# Altium PCB IQDemod.PcbDoc (part 1 of 2)
Units mm, origin at the board's own origin, x right, y up, seen from the top; angles counter-clockwise.
Board outline 91.45 x 68.67 mm, 4 copper layers (Top Layer, Layer 1, Layer 2, Bottom Layer), stack 1.586 mm thick; 81 components, 32 nets, 226 pads, 413 vias.
Unrouted connection lines stored in the file: 58.
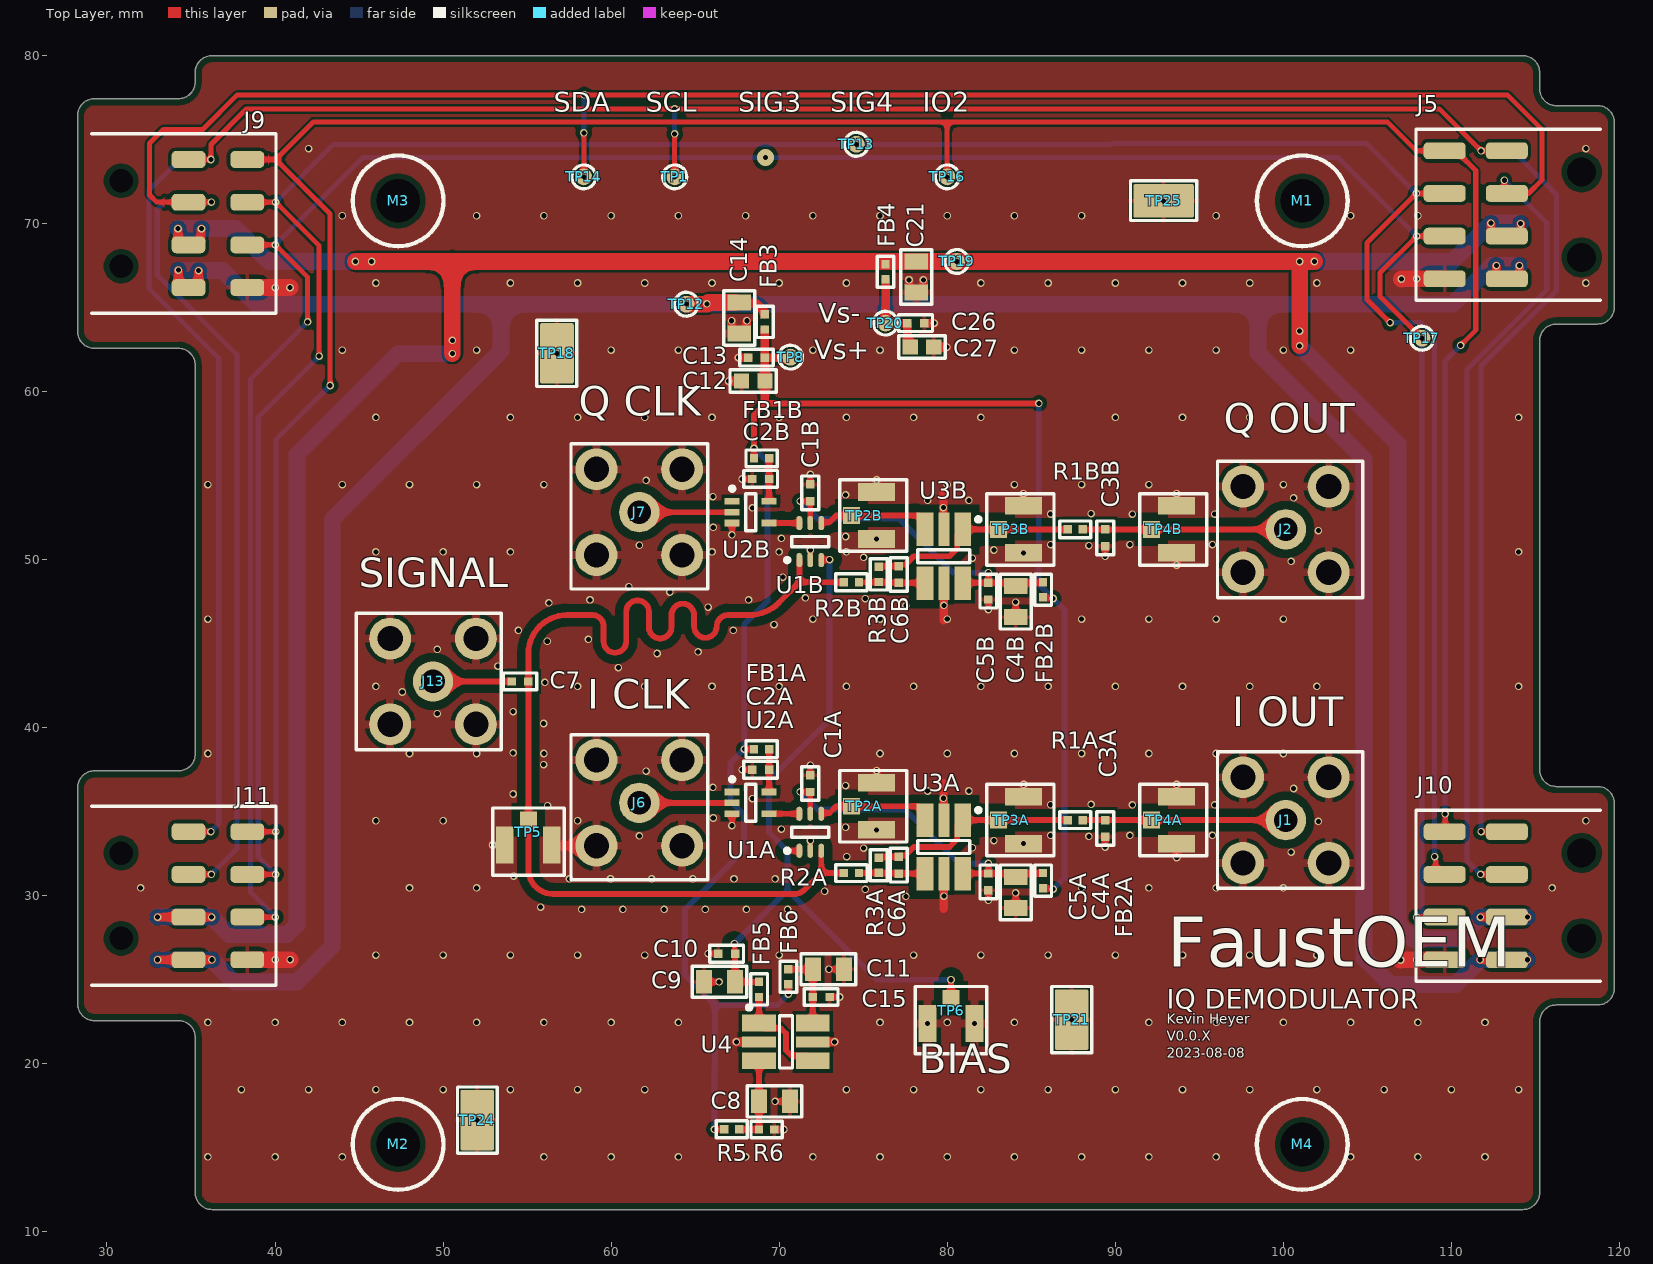
[diagram p0: Top Layer view]
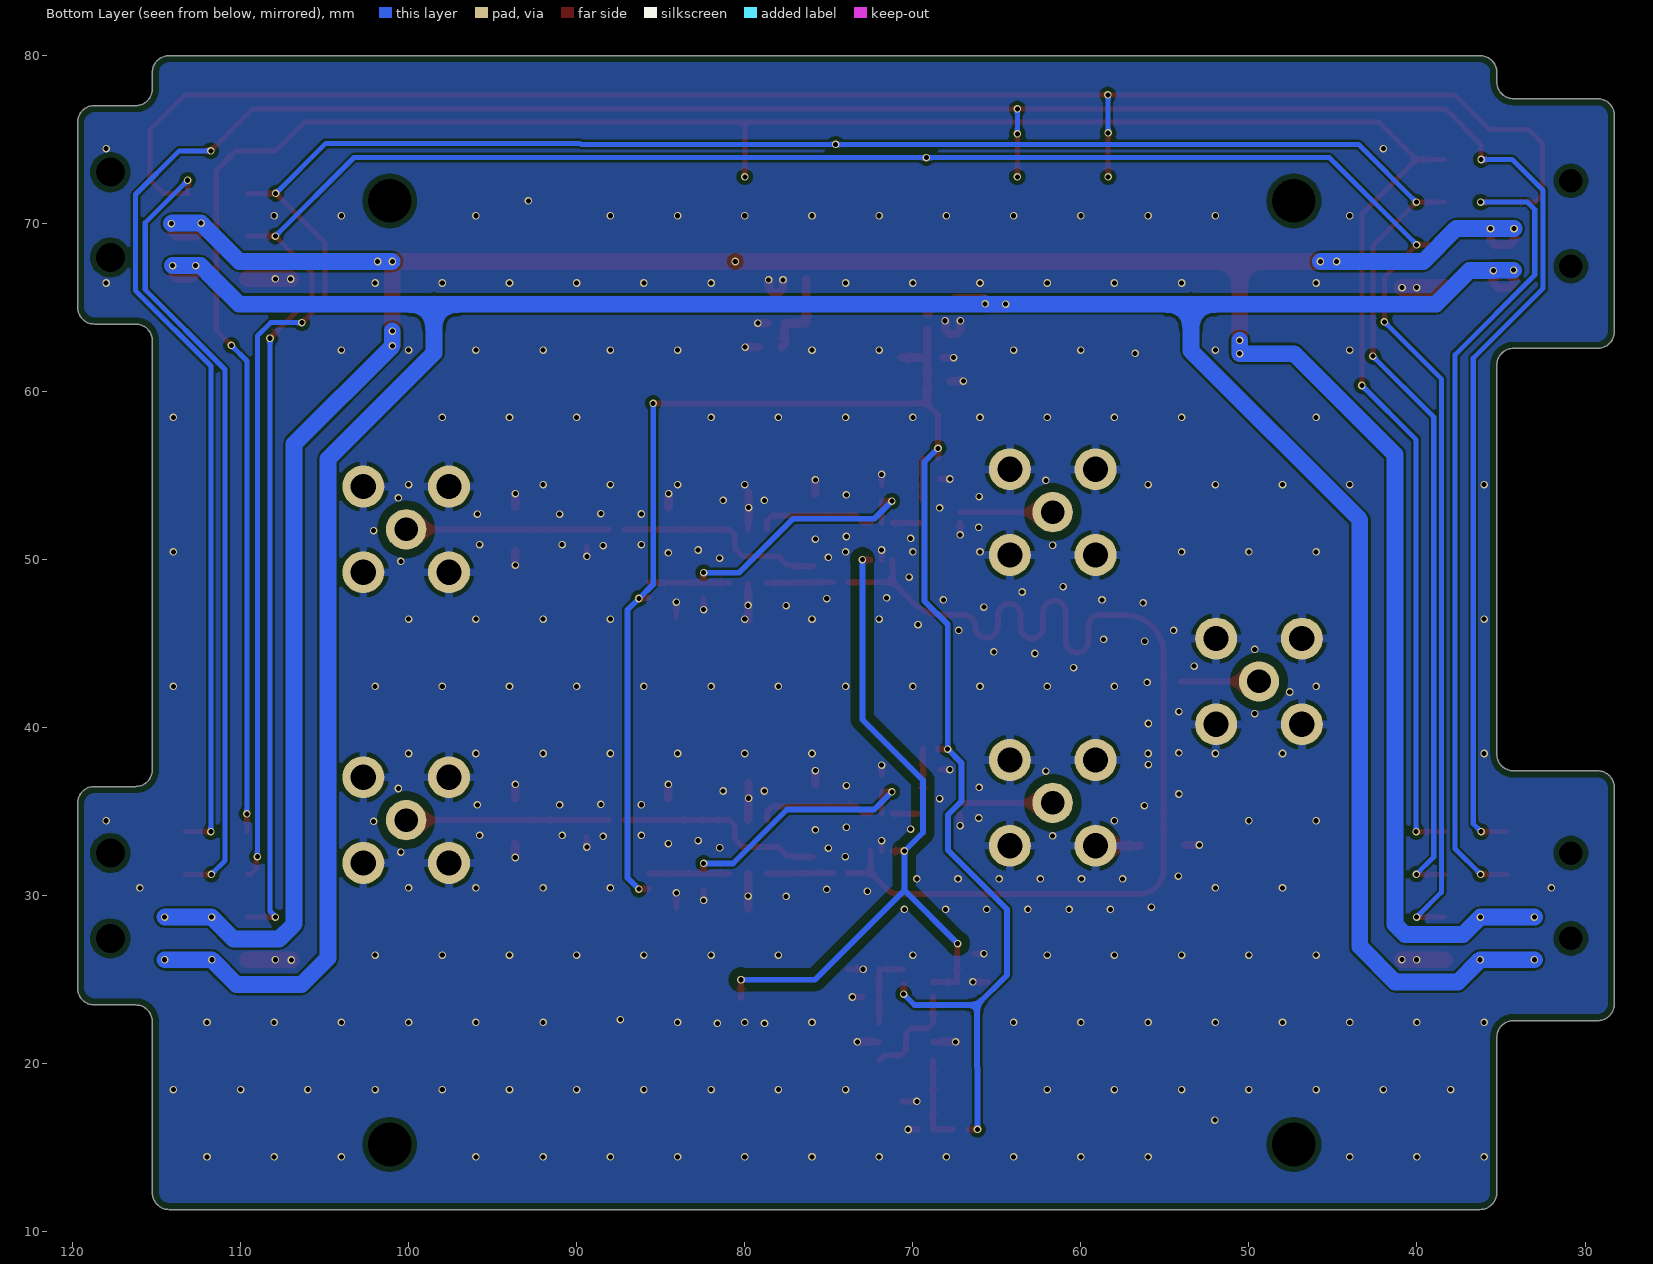
[diagram p1: Bottom Layer view, seen from below]
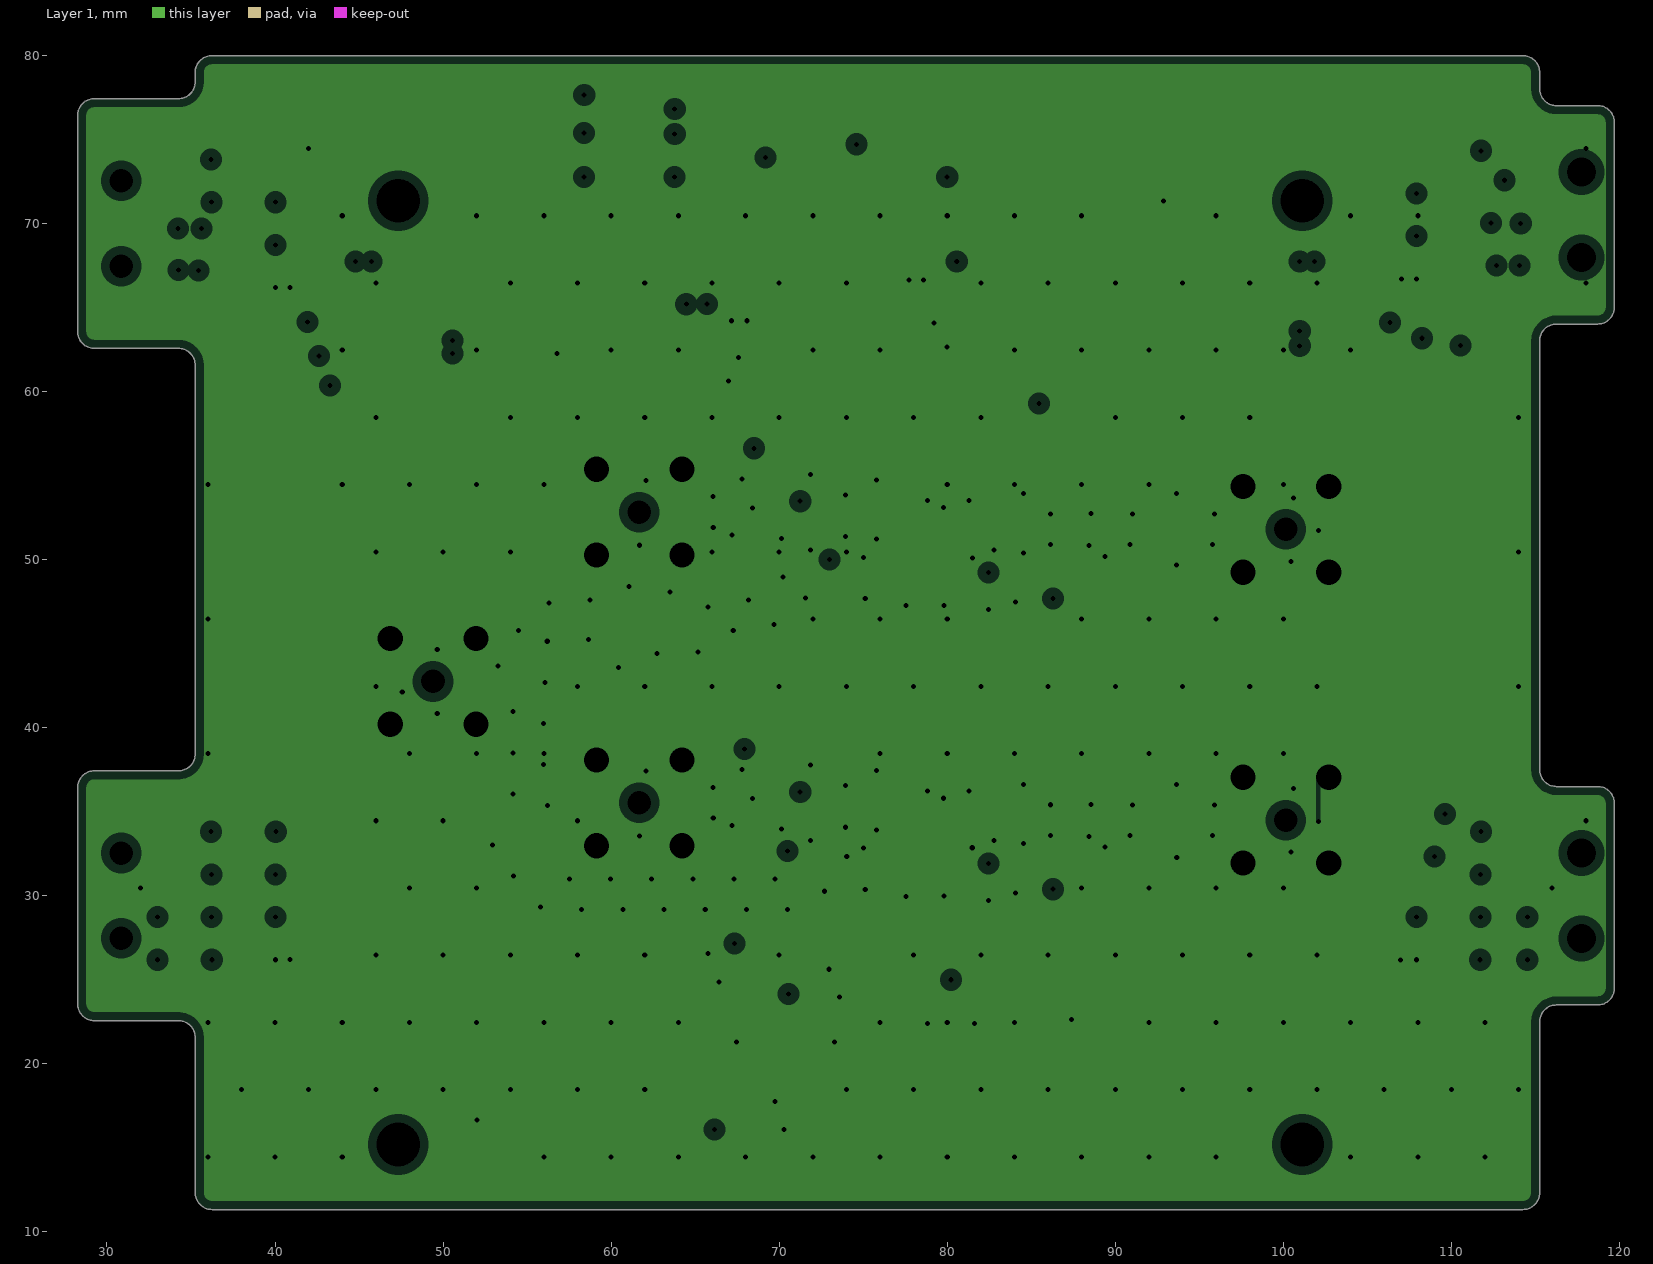
[diagram p2: Layer 1, clearances drawn from the general rule]
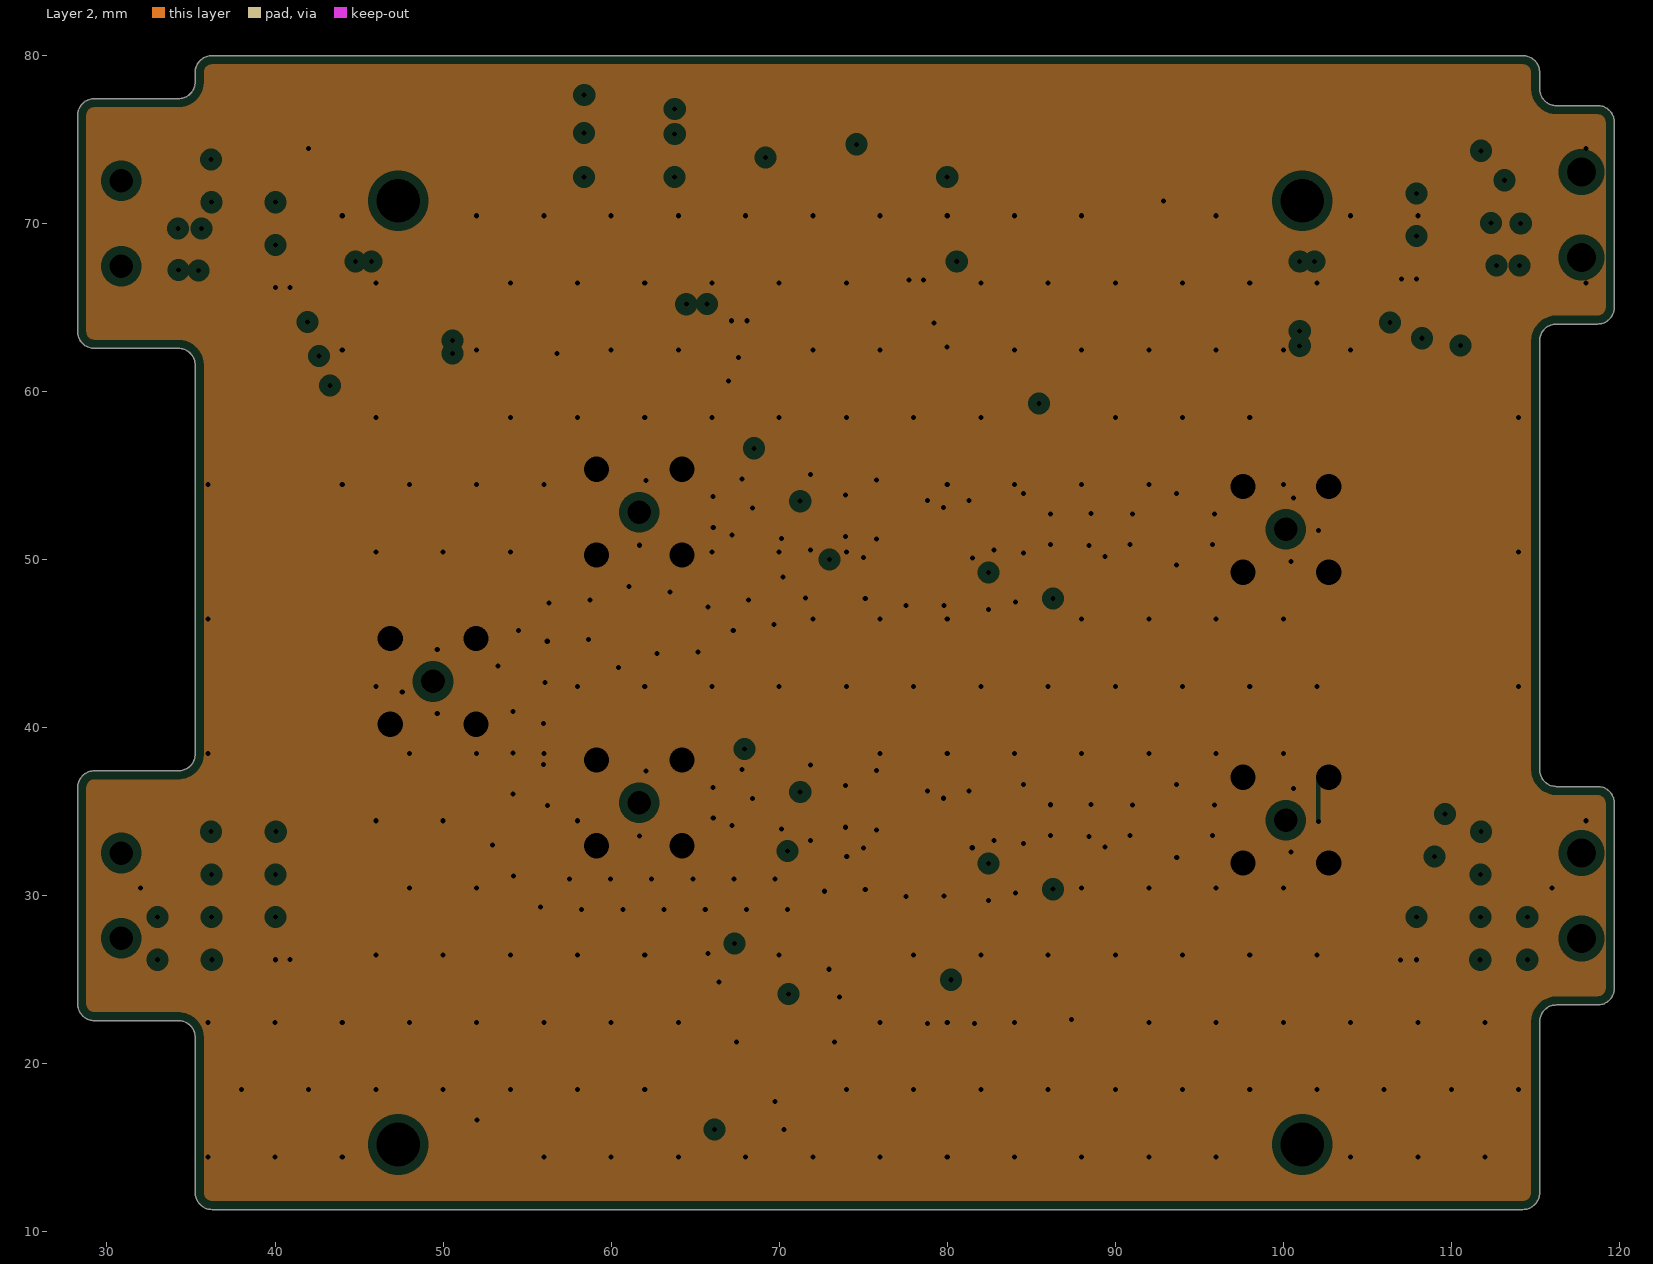
[diagram p3: Layer 2, clearances drawn from the general rule]
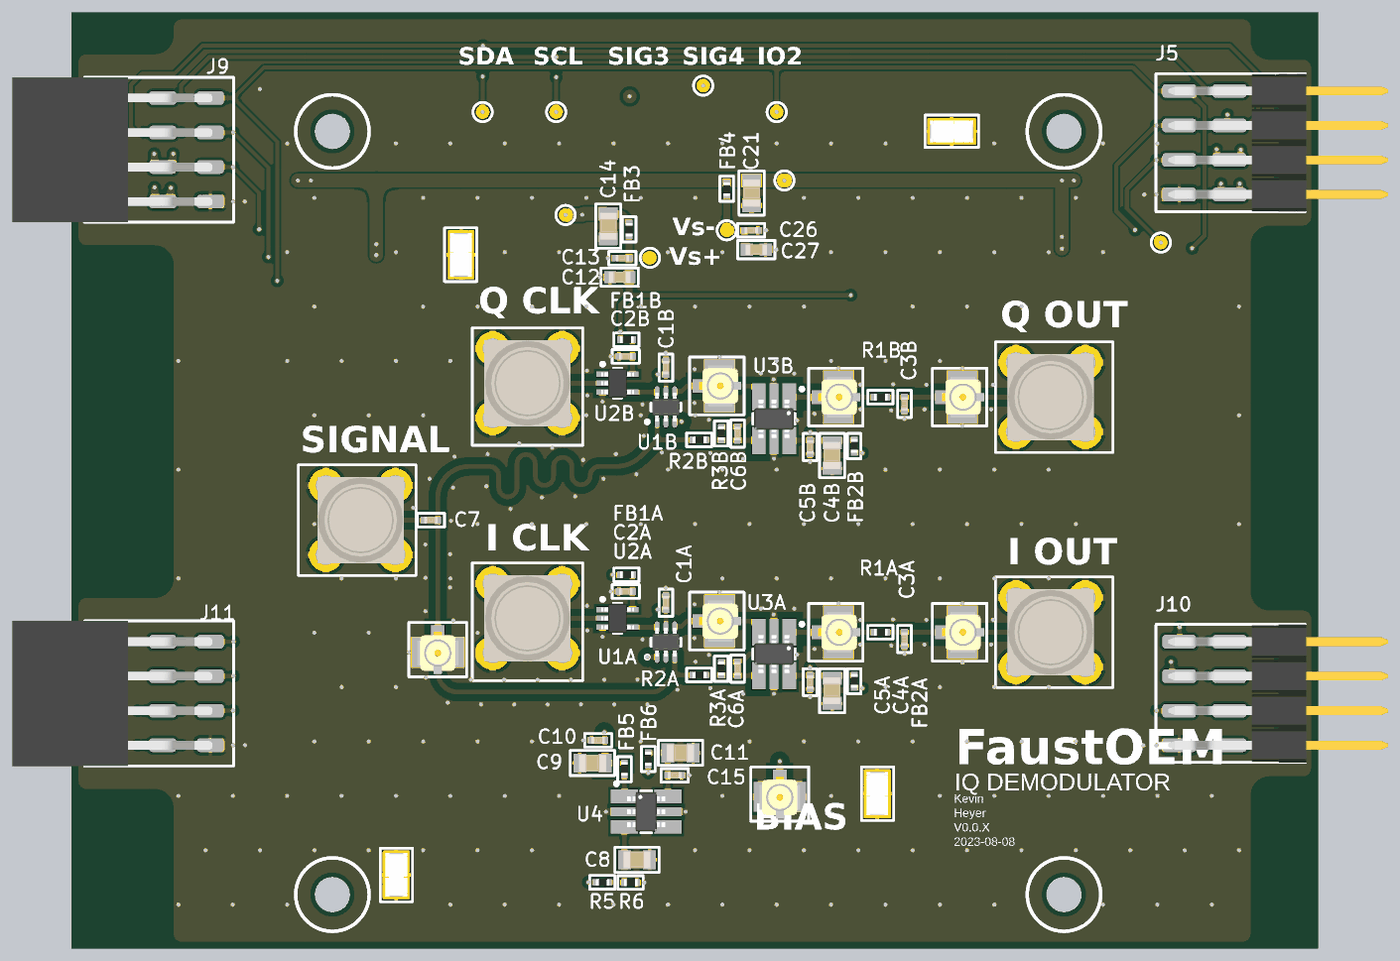
[diagram p4: 3D render of the assembled board from above, using the file's embedded part models]

## Layer stack, top to bottom
Top Solder: solder mask 0.02, SM-001, Dk 3.8
Top Layer: signal copper 0.035
Dielectric 2: prepreg 0.2104, PP-006, Dk 4.6
Layer 1: plane copper 0.0152, net GND
Dielectric 1: dielectric 1.065, FR-4, Dk 4.6
Layer 2: plane copper 0.0152, net GND
Dielectric 3: prepreg 0.2104, PP-006, Dk 4.6
Bottom Layer: signal copper 0.035
Bottom Solder: solder mask 0.02, SM-001, Dk 3.8

## Board outline
29.25,22.57 cw(c29.25,23.57) 28.25,23.57 28.25,36.43 cw(c29.25,36.43) 29.25,37.43 34.25,37.43 ccw(c34.25,38.43) 35.25,38.43 35.25,61.57 ccw(c34.25,61.57) 34.25,62.57 29.25,62.57 cw(c29.25,63.57) 28.25,63.57 28.25,76.43 cw(c29.25,76.43) 29.25,77.43 34.25,77.43 ccw(c34.25,78.43) 35.25,78.43 35.25,78.994 cw(c36.25,78.994) 36.25,79.994 114.231,79.994 114.25,79.994 cw(c114.25,78.994) 115.25,78.994 115.25,78.02 ccw(c116.25,78.02) 116.25,77.02 118.701,77.02 cw(c118.701,76.02) 119.701,76.02 119.701,65.02 cw(c118.701,65.02) 118.701,64.02 116.25,64.02 ccw(c116.25,63.02) 115.25,63.02 115.25,37.5 ccw(c116.25,37.5) 116.25,36.5 118.701,36.5 cw(c118.701,35.5) 119.701,35.5 119.701,24.5 cw(c118.701,24.5) 118.701,23.5 116.25,23.5 ccw(c116.25,22.5) 115.25,22.5 115.25,12.327 cw(c114.25,12.327) 114.25,11.327 36.25,11.327 cw(c36.25,12.327) 35.25,12.327 35.25,21.57 ccw(c34.25,21.57) 34.25,22.57

## Design rules (kind name [scope] priority, off if disabled: settings)
BoardOutlineClearance BoardOutlineClearance_Part [InComponent('J3', 'J4','J5','J6')] p1: gap=0 ignorepadtopadclearanceinfootprint=FALSE
BoardOutlineClearance [OnCopper] p2: gap=0.4 ignorepadtopadclearanceinfootprint=FALSE except(0: Arc-SplitContinuation Track-SplitContinuation SMDPad-SplitContinuation THPad-SplitContinuation Via-SplitContinuation Fill-SplitContinuation Poly-SplitContinuation Region-SplitContinuation Text-SplitContinuation)
Clearance "Schematic Clearance Constraint_1" [InNetClass('HS_NET') vs not InNetClass('HS_NET')] p1: gap=0.254 ignorepadtopadclearanceinfootprint=TRUE except(0: Arc-Hole Track-Hole SMDPad-Hole THPad-Hole Via-Hole Fill-Hole Poly-Hole Region-Hole Text-Hole; 0.508: Arc-Fill Arc-Poly Arc-Region Track-Fill Track-Poly Track-Region SMDPad-Fill SMDPad-Poly SMDPad-Region THPad-Fill THPad-Poly THPad-Region Via-Fill Via-Poly Via-Region Fill-Fill Fill-Poly Fill-Region Poly-Poly Poly-Region Region-Region)
Clearance Clearance_HS_PLANE [InNetClass('USB') vs IsCopperRegion and not InNet('4V0')] p2: gap=0.254 ignorepadtopadclearanceinfootprint=FALSE except(0: Arc-Hole Track-Hole SMDPad-Hole THPad-Hole Via-Hole Fill-Hole Poly-Hole Region-Hole Text-Hole; 0.09: Arc-Arc Arc-Track Track-Track; 0.102: Arc-SMDPad Track-SMDPad; 0.127: SMDPad-SMDPad; 0.2: SMDPad-Fill SMDPad-Poly SMDPad-Region Fill-Fill Fill-Poly Fill-Region Poly-Poly Poly-Region Region-Region; 0.33: Arc-THPad Track-THPad SMDPad-THPad; 0.5: Arc-Fill Arc-Poly Arc-Region Track-Fill Track-Poly Track-Region THPad-THPad THPad-Via THPad-Fill THPad-Poly THPad-Region THPad-Text Via-Via)
Clearance Clearance_BGA [InNetClass('BGA_FINE_PITCH') vs not IsThruPin] p3: gap=0.254 ignorepadtopadclearanceinfootprint=FALSE except(0: Arc-Hole Track-Hole SMDPad-Hole THPad-Hole Via-Hole Fill-Hole Poly-Hole Region-Hole Text-Hole; 0.09: Arc-Arc Arc-Track Track-Track; 0.102: Arc-SMDPad Track-SMDPad; 0.127: Arc-Fill Arc-Poly Arc-Region Track-Fill Track-Poly Track-Region SMDPad-SMDPad; 0.2: SMDPad-Fill SMDPad-Poly SMDPad-Region Fill-Fill Fill-Poly Fill-Region Poly-Poly Poly-Region Region-Region; 0.33: Arc-THPad Track-THPad SMDPad-THPad; 0.5: THPad-THPad THPad-Via THPad-Fill THPad-Poly THPad-Region THPad-Text Via-Via)
Clearance Clearance_TH [IsThruPin and InAnyNet] p4: gap=0.3 ignorepadtopadclearanceinfootprint=FALSE except(0: Arc-Hole Track-Hole SMDPad-Hole THPad-Hole Via-Hole Fill-Hole Poly-Hole Region-Hole Text-Hole; 0.09: Arc-Arc Arc-Track Track-Track; 0.127: Arc-SMDPad Track-SMDPad SMDPad-SMDPad; 0.254: Arc-Via Arc-Text Track-Via Track-Text SMDPad-Via SMDPad-Text Via-Text Fill-Text Poly-Text Region-Text Text-Text; 0.33: Arc-THPad Track-THPad SMDPad-THPad; 0.5: THPad-Via THPad-Text Via-Via)
Clearance [All] p5: gap=0.254 ignorepadtopadclearanceinfootprint=FALSE except(0: Arc-Hole Track-Hole SMDPad-Hole THPad-Hole Via-Hole Fill-Hole Poly-Hole Region-Hole Text-Hole; 0.127: Arc-SMDPad Arc-Fill Arc-Poly Arc-Region Track-SMDPad Track-Fill Track-Poly Track-Region SMDPad-SMDPad; 0.15: Arc-Arc Arc-Track Track-Track; 0.2: SMDPad-Fill SMDPad-Poly SMDPad-Region Fill-Fill Fill-Poly Fill-Region Poly-Poly Poly-Region Region-Region; 0.3: THPad-THPad; 0.31: THPad-Via; 0.32: THPad-Fill THPad-Poly THPad-Region; 0.33: THPad-Text; 0.5: Via-Via)
DiffPairsRouting [All] p1: maxlimit=0.127 minlimit=0.127 mostfreqgap=0.127 toplayer_minwidth=0.102 toplayer_maxwidth=0.147 toplayer_prefwidth=0.147 bottomlayer_minwidth=0.102 bottomlayer_maxwidth=0.147 bottomlayer_prefwidth=0.147 maxuncoupledlength=12.7
HoleSize [All] p1: absolutevalues=TRUE maxlimit=6.3 minlimit=0.3 maxpercent=80.000 minpercent=20.000
HoleToHoleClearance [All] p1: gap=0.1 allowstackedmicrovias=TRUE
MatchedLengths MatchLengths_xSignals_C7_U1A,U1B [InxSignalClass('xSignals_C7_U1A,U1B_MatchLengthsClass')] p1: tolerance=2.54 checknetsindiffpair=FALSE checkdiffpairvsdiffpair=TRUE checkxsignals=TRUE checkothers=TRUE
MatchedLengths MatchLengths_xSignals_J2_U5 [InxSignalClass('xSignals_J2_U5_MatchLengthsClass')] p2: tolerance=1.1 checknetsindiffpair=FALSE checkdiffpairvsdiffpair=TRUE checkxsignals=TRUE checkothers=TRUE
MatchedLengths MatchLengths_xSignals_U5_J2 [InxSignalClass('xSignals_U5_J2_MatchLengthsClass')] p3: tolerance=2.54 checknetsindiffpair=FALSE checkdiffpairvsdiffpair=TRUE checkxsignals=TRUE checkothers=TRUE
MaxMinImpedance "Schematic Impedance Constraint_1" [InNetClass('HS_NET')] p1: minimum=42.50 maximum=57.50
MinimumAnnularRing [All] p1: minimumring=0.075
PlaneClearance [All] p1: clearance=0.508
PlaneConnect [All] p1: pad.planeconnectstyle=Relief pad.reliefexpansion=0.508 pad.reliefentries=4 pad.reliefconductorwidth=0.254 pad.reliefairgap=0.254 via.planeconnectstyle=Direct via.reliefexpansion=0.508 via.reliefentries=4 via.reliefconductorwidth=0.254 via.reliefairgap=0.254
PolygonConnect [All] p1: thpad.connectstyle=Relief thpad.reliefconductorwidth=0.5 thpad.reliefentries=4 thpad.polygonreliefangle="90 Angle" thpad.airgapwidth=0.254 smdpad.connectstyle=Relief smdpad.reliefconductorwidth=0.254 smdpad.reliefentries=4 smdpad.polygonreliefangle="90 Angle" smdpad.airgapwidth=0.254 via.connectstyle=Direct via.reliefconductorwidth=0.254 via.reliefentries=4 via.polygonreliefangle="90 Angle" via.airgapwidth=0.254
RoomDefinition DemodQ [InComponentClass('DemodQ')] p1: confinementstyle=ConfineIn formatcopy=TRUE lockcomponents=FALSE outline 57.3,45.25 104.4,45.25 104.4,57.55 57.3,57.55
RoomDefinition IQDemod [InComponentClass('IQDemod')] p2: confinementstyle=ConfineIn formatcopy=TRUE lockcomponents=FALSE outline 22.7,2.113 125.25,2.113 125.25,76.213 22.7,76.213
RoomDefinition DemodI [InComponentClass('DemodI')] p3: confinementstyle=ConfineIn formatcopy=TRUE lockcomponents=FALSE outline 57.3,27.95 104.4,27.95 104.4,40.25 57.3,40.25
RoutingVias [All] p1: holewidth=0.2 width=0.5 viastyle="Through Hole" minholewidth=0.2 minwidth=0.45 maxholewidth=0.4 maxwidth=0.8
SilkToSilkClearance [All] p1: silktosilkclearance=0
SilkToSolderMaskClearance [IsPad] p1: minsilkscreentomaskgap=0 clearancetoexposedcopper=TRUE
SolderMaskExpansion SolderMaskExpansion_VIa [isVia] p1: expansion=0.102 istentingtop=TRUE
SolderMaskExpansion [All] p2: expansion=0.05 istentingtop=FALSE
UnRoutedNet [All] p1: checkbadconnections=TRUE
Width Width_HS [InNetClass('HS_NET')] p1: maxlimit=0.345 minlimit=0.345 preferedwidth=0.345 impedanceprofiledriven=TRUE impedanceprofileid={1FF9B707-F771-4573-8292-77CF4BFD93AA} impedanceprofilevalue=50.000000 minimp=50.000000 maximp=50.000000 favimp=50.000000
Width [All] p2: maxlimit=999 minlimit=0.127 preferedwidth=0.254
22 further rules are at their usual default settings.

## Classes and differential pairs
channel class Demod: DemodI DemodQ
component class DemodQ: C1B C2B C3B C4B C5B C6B FB1B FB2B R1B R2B R3B TP2B TP3B TP4B U1B U2B U3B
component class DemodI: C1A C2A C3A C4A C5A C6A FB1A FB2A R1A R2A R3A TP2A TP3A TP4A U1A U2A U3A
net class HS_NET: CLK_I CLK_Q ISIGNAL ISIGNAL_AC nSELECTA nSELECTB OP-A OP-B OP_OUT_A OP_OUT_B OSIG_I OSIG_Q SWITCH_OUTA SWITCH_OUTB Vbias
component class IQDemod: C7 C8 C9 C10 C11 C12 C13 C14 C15 C21 C26 C27 FB3 FB4 FB5 FB6 J1 J2 J5 J6 J7 J9 J10 J11 J13 M1 M2 M3 M4 R5 R6 TP1 TP5 TP6 TP8 TP12 TP13 TP14 TP16 TP17 TP18 TP19 TP20 TP21 TP24 TP25 U4

## Components (designator, comment, footprint, x,y, rotation, side; value= is the part's Value field where it differs from the comment)
C1A "100nF" C0402 71.85,36.675 r90 top (schematic designator C1)
C1B "100nF" C0402 71.85,53.975 r90 top (schematic designator C1)
C2A "100nF" C0402 68.9,37.5 r180 top (schematic designator C2)
C2B "100nF" C0402 68.9,54.8 r180 top (schematic designator C2)
C3A "470nF" C0402 89.4,34 r90 top (schematic designator C3)
C3B "470nF" C0402 89.4,51.3 r90 top (schematic designator C3)
C4A "10uF" c0805 84.075,30.2 r90 top (schematic designator C4)
C4B "10uF" c0805 84.075,47.5 r90 top (schematic designator C4)
C5A "100nF" C0402 82.45,30.825 r270 top (schematic designator C5)
C5B "100nF" C0402 82.45,48.125 r270 top (schematic designator C5)
C6A "100pF" C0402 77.117,31.817 r270 top (schematic designator C6)
C6B "100pF" C0402 77.117,49.117 r270 top (schematic designator C6)
C7 "4.7uF" C0402 54.575,42.75 r0 top
C8 "10uF" c0805 69.725,17.76 r180 top
C9 "10uF" c0805 66.45,24.875 r0 top
C10 "100nF" C0402 66.875,26.55 r180 top
C11 "10uF" c0805 72.925,25.625 r180 top
C12 "1uF" c0603 68.45,60.625 r0 top
C13 "100nF" C0402 68.65,62.025 r0 top
C14 "10uF" c0805 67.616,64.375 r90 top
C15 "100nF" C0402 72.5,23.975 r0 top
C21 "10uF" c0805 78.154,66.817 r90 top
C26 "100nF" C0402 78.125,64.075 r180 top
C27 "1uF" c0603 78.5,62.65 r180 top
FB1A "68R" FB0402 68.95,38.725 r180 top (schematic designator FB1)
FB1B "68R" FB0402 68.95,56.025 r180 top (schematic designator FB1)
FB2A "68R" FB0402 85.7,30.9 r270 top (schematic designator FB2)
FB2B "68R" FB0402 85.7,48.2 r270 top (schematic designator FB2)
FB3 "68R" FB0402 69.15,64.144 r90 top
FB4 "68R" FB0402 76.325,67.125 r90 top
FB5 "68R" FB0402 68.8,24.425 r270 top
FB6 "68R" FB0402 70.55,25.175 r270 top
J1 "HJ-2LC15SF026" "SMA TH BORE" 100.15,34.5 r90 top
J2 "HJ-2LC15SF026" "SMA TH BORE" 100.15,51.8 r90 top
J5 "610108249121" "CONN HDR 08 MALE RA 2ROW - duplicate" 111.451,70.52 r270 top locked
J6 "HJ-2LC15SF026" "SMA TH BORE" 61.675,35.525 r0 top
J7 "HJ-2LC15SF026" "SMA TH BORE" 61.675,52.825 r0 top
J9 "M22-6550442R" "CONN HDR 08 FEMALE RA 2ROW" 36.5,70 r90 top locked
J10 "610108249121" "CONN HDR 08 MALE RA 2ROW - duplicate" 111.451,30 r270 top locked
J11 "M22-6550442R" "CONN HDR 08 FEMALE RA 2ROW" 36.5,30 r90 top locked
J13 "HJ-2LC15SF026" "SMA TH BORE" 49.4,42.75 r270 top
M1 "M2.0" "MECH M2.0 UNPLATED" 101.125,71.35 r0 top
M2 "M2.0" "MECH M2.0 UNPLATED" 47.325,15.2 r0 top
M3 "M2.0" "MECH M2.0 UNPLATED" 47.325,71.35 r0 top
M4 "M2.0" "MECH M2.0 UNPLATED" 101.125,15.2 r0 top
R1A "100R" R0402 87.65,34.5 r180 top (schematic designator R1)
R1B "100R" R0402 87.65,51.8 r180 top (schematic designator R1)
R2A "100R" R0402 74.325,31.35 r180 top (schematic designator R2)
R2B "100R" R0402 74.325,48.65 r180 top (schematic designator R2)
R3A "200R" R0402 75.925,31.843 r270 top (schematic designator R3)
R3B "200R" R0402 75.925,49.143 r270 top (schematic designator R3)
R5 "1k00" R0402 67.2,16.1 r180 top
R6 "1k00" R0402 69.275,16.091 r180 top
TP1 "1mm" TESTPOINT_SMT 63.781,72.775 r90 top
TP2A "U.FL" U.FL 75.8,35.325 r270 top (schematic designator TP2)
TP2B "U.FL" U.FL 75.8,52.625 r270 top (schematic designator TP2)
TP3A "U.FL" U.FL 84.55,34.5 r270 top (schematic designator TP3)
TP3B "U.FL" U.FL 84.55,51.8 r270 top (schematic designator TP3)
TP4A "U.FL" U.FL 93.65,34.5 r270 top (schematic designator TP4)
TP4B "U.FL" U.FL 93.65,51.8 r270 top (schematic designator TP4)
TP5 "U.FL" U.FL 55.075,33.021 r180 top
TP6 "U.FL" U.FL 80.225,22.4 r180 top
TP8 "1mm" TESTPOINT_SMT 70.675,62.05 r0 top
TP12 "1mm" TESTPOINT_SMT 64.471,65.2 r90 top
TP13 "1mm" TESTPOINT_SMT 74.594,74.715 r90 top
TP14 "1mm" TESTPOINT_SMT 58.375,72.775 r90 top
TP16 "1mm" TESTPOINT_SMT 80,72.775 r90 top
TP17 "1mm" TESTPOINT_SMT 108.25,63.175 r270 top
TP18 "CLIP" TESTPOINT_CLIP_1206 56.775,62.275 r90 top
TP19 "1mm" TESTPOINT_SMT 80.565,67.742 r90 top
TP20 "1mm" TESTPOINT_SMT 76.325,64.075 r90 top
TP21 "CLIP" TESTPOINT_CLIP_1206 87.4,22.625 r270 top
TP24 "CLIP" TESTPOINT_CLIP_1206 52.025,16.65 r270 top
TP25 "CLIP" TESTPOINT_CLIP_1206 92.875,71.35 r0 top
U1A "SN74LVC1G3157DCKR" SC70-6 71.85,33.775 r90 top (schematic designator U1)
U1B "SN74LVC1G3157DCKR" SC70-6 71.85,51.075 r90 top (schematic designator U1)
U2A "74LVC1G14SE-7" "SC70 5pin TI DCK" 68.3,35.525 r0 top (schematic designator U2)
U2B "74LVC1G14SE-7" "SC70 5pin TI DCK" 68.3,52.825 r0 top (schematic designator U2)
U3A "SOT5/6-23 GENERIC" SOT23-5/6_Modified 79.8,32.9 r270 top (schematic designator U3)
U3B "SOT5/6-23 GENERIC" SOT23-5/6_Modified 79.8,50.2 r270 top (schematic designator U3)
U4 "SOT5/6-23 GENERIC" SOT23-5/6_Modified 70.4,21.3 r0 top

## Footprints (in the part's own frame and the unit in brackets; to place one, negate y for a bottom-side part, rotate by r counter-clockwise, add the part's x,y. Pads: shape width x height; smd on the part's side, far side on the other; paste and mask are expansions set on the pad)
C0402 [mm]
  rect 0.5x0.5 smd: 1(-0.5,0) 2(0.5,0)
  silkscreen extent -1,-0.5 1,0.5, body extent -0.5,-0.25 0.5,0.25, height 0.51
c0603 [mm]
  rect 0.9x0.9 smd: 1(-0.7,0) 2(0.7,0)
  silkscreen extent -1.38,-0.68 1.38,0.67, body extent -0.8,-0.4 0.8,0.4, height 0.81
c0805 [mm]
  rect 0.95x1.4 smd: 1(-0.925,0) 2(0.925,0)
  silkscreen extent -1.63,-0.92 1.63,0.92, body extent -1,-0.62 1,0.63, height 0.61
"CONN HDR 08 FEMALE RA 2ROW" [mm]
  round 0 hole 1.4 unplated: 0(-2.54,5.659) 0(2.54,5.659)
  rrect50% 1x2 smd: 1(3.81,1.649) 2(1.27,1.649) 3(-1.27,1.649) 4(-3.81,1.649) 5(3.81,-1.849) 6(1.27,-1.849) 7(-1.27,-1.849) 8(-3.81,-1.849)
  silkscreen extent -5.33,-3.56 5.33,7.41, body extent -5.33,-2 5.33,12.69, height 5.01
"CONN HDR 08 MALE RA 2ROW - duplicate" [mm]
  round 0 hole 1.73 unplated: 0(-2.54,6.299) 0(2.54,6.299)
  rrect50% 1x2.5 smd: 1(-3.81,1.849) 2(-1.27,1.849) 3(1.27,1.849) 4(3.81,1.849) 5(-3.81,-1.849) 6(-1.27,-1.849) 7(1.27,-1.849) 8(3.81,-1.849)
  silkscreen extent -5.08,-3.56 5.08,7.41, body extent -5.08,-2.67 5.08,13.49, height 5.09
FB0402 [mm]
  rect 0.5x0.5 smd: 1(-0.45,0) 2(0.45,0)
  silkscreen extent -0.92,-0.5 0.92,0.5, body extent -0.53,-0.25 0.47,0.25, height 0.36
"MECH M2.0 UNPLATED" [mm]
  round 0 hole 2.6 unplated: 1(0,0)
  silkscreen extent -2.7,-2.7 2.7,2.7
R0402 [mm]
  rect 0.5x0.5 smd: 1(-0.425,0) 2(0.475,0)
  silkscreen extent -0.9,-0.5 0.95,0.5, body extent -0.5,-0.25 0.5,0.25, height 0.36
"SC70 5pin TI DCK" [mm]
  rect 0.9x0.4 smd: 1(-1.1,0.65) 2(-1.1,0) 3(-1.1,-0.65) 4(1.1,-0.65) 5(1.1,0.65)
  silkscreen extent -1.22,-1.1 0.3,1.52, body extent -1.2,-1.07 1.2,1.07, height 1.1
SC70-6 [mm] "TSOP, 6-Leads, Body 2.00x1.25mm, Pitch 0.65mm, IPC Medium Density"
  oval 0.85x0.35 smd: 1(-1.1,0.65) 2(-1.1,0) 3(-1.1,-0.65) 4(1.1,-0.65) 5(1.1,0) 6(1.1,0.65)
  silkscreen extent -1.22,-1.1 0.3,1.5, body extent -1.05,-1 1.05,1, height 1
"SMA TH BORE" [mm]
  round 2.5 hole 1.5: 0(-2.55,-2.55) 0(-2.55,2.55) 0(2.55,-2.55) 0(2.55,2.55)
  round 2.4 hole 1.4: 1(0,0)
  silkscreen extent -4.06,-4.57 4.06,4.06, body extent -3.18,-3.18 3.18,3.18, height 9.55
SOT23-5/6_Modified [mm] "SOT23, 6-Leads, Body 2.90x2.80mm, Pitch 0.95mm, IPC Low Density"
  rect 2x1 smd: 1(-1.6,1.125) 3(-1.6,-1.125) 4(1.6,-1.125) 6(1.6,1.125)
  rect 2x0.65 smd: 2(-1.6,0) 5(1.6,0)
  silkscreen extent -2.32,-1.55 0.39,2.18, body extent -1.4,-1.45 1.4,1.45, height 1.45
TESTPOINT_CLIP_1206 [mm]
  rrect10% 3.6x2 smd paste-1111: 1(0,0)
  silkscreen extent -1.97,-1.17 1.97,1.2, body extent -1.6,-0.8 1.6,0.8, height 2.01
TESTPOINT_SMT [mm] "testpoint smt"
  round 1 smd paste-1111: 1(0,0)
  silkscreen extent -0.71,-0.71 0.71,0.71
U.FL [mm] "SOT23, 6-Leads, Body 2.90x2.80mm, Pitch 0.95mm, IPC Low Density"
  rect 1.05x2.2 smd: 0(-1.4,0) 0(1.4,0)
  rect 1x1 smd: 1(0,-1.5)
  silkscreen extent -2.13,-2.2 2.13,1.8, body extent -1.5,-1.5 1.5,1.6, height 1.26

## Part data
C1A C1B C2A C2B C5A C5B C10 C13 C15 C26: library part "CAP CER 100nF 25V X5R 0402", "Cap Ceramic 0.1uF 25V X5R 10% Pad SMD 0402 85¡ãC T/R / Multi Layer Ceramic Capacitor (MLCC)", Case Code (Imperial)=0402, Case Code (Metric)=1005, Dielectric=X5R, Manufacturer=Samsung, Manufacturer Part Number=CL05A104KA5NNNC, Max Operating Temperature=85°C, Min Operating Temperature=-55°C, Package Quantity=1, Supplier Part Number 1=1276-1043-1-ND, Tolerance=10%, Voltage=25V, Capacitance=100nF, Case/Package=0402, Category="Ceramic Capacitors", ComponentLink1Description=https://datasheet.ciiva.com/25802/cl05a104ka5nnnc-25802704.pdf?src-supplier=Digi-Key, ComponentLink1URL=https://datasheet.ciiva.com/25802/cl05a104ka5nnnc-25802704.pdf?src-supplier=Digi-Key, ComponentLink2Description=https://datasheet.ciiva.com/26838/getdatasheetpartid-357412-26838142.pdf?src-supplier=Verical, ComponentLink2URL=https://datasheet.ciiva.com/26838/getdatasheetpartid-357412-26838142.pdf?src-supplier=Verical, ComponentLink3Description=https://datasheet.ciiva.com/16437/cl05a104ka5nnnc-16437369.pdf?src-supplier=Future+Electronics, ComponentLink3URL=https://datasheet.ciiva.com/16437/cl05a104ka5nnnc-16437369.pdf?src-supplier=Future+Electronics, ComponentLink4Description=https://datasheet.ciiva.com/26309/mlcc-catalogdownload2013-eng-26309014.pdf?src-supplier=Distrelec, ComponentLink4URL=https://datasheet.ciiva.com/26309/mlcc-catalogdownload2013-eng-26309014.pdf?src-supplier=Distrelec, Construction=Flat, Depth=0.5mm, Height=0.5mm, Lead Free="Lead Free", Length=1mm, Mount="Surface Mount", Packaging="Tape and Reel", Pricing 1="1=0.10000, 10=0.01100, 50=0.00600, 100=0.00490, 500=0.00346, 1000=0.00272, 2500=0.00248, 5000=0.00228 (USD)", Radiation Hardening=No, RoHS=Yes, Series=CL, Stock 1=8053194, Supplier 1=Digi-Key, Thickness=0.022inch, Voltage Rating=25V, Voltage Rating (DC)=25V, Width=0.02inch
C3A C3B: library part "CAP CER 470nF 10V X7R 0402", "Multilayer Ceramic Capacitor, 0.47 uF, 50 V, ± 2%, C0G (NP0), 0402 [1005 Metric]", Case/Package=0402, Dielectric=X7R, Manufacturer 1=Yageo, Manufacturer Part Number 1=CC0402KRX7R6BB474, Max Operating Temperature=125°C, Min Operating Temperature=-55°C, Supplier Part Number 1=09AK0987, Tolerance=10%, Voltage Rating=10V, Category 1="Ceramic Capacitors", ComponentLink1Description=http://www.yageo.com/documents/recent/UPY-GPHC_X7R_6.3V-to-50V_18.pdf?src-supplier=Digi-Key, ComponentLink1URL=http://www.yageo.com/documents/recent/UPY-GPHC_X7R_6.3V-to-50V_18.pdf?src-supplier=Digi-Key, ComponentLink2Description=https://datasheet.octopart.com/CC0402KRX7R6BB474-Yageo-datasheet-151948686.pdf?src-supplier=Farnell, ComponentLink2URL=https://datasheet.octopart.com/CC0402KRX7R6BB474-Yageo-datasheet-151948686.pdf?src-supplier=Farnell, ComponentLink3Description=https://datasheet.octopart.com/CC0402KRX7R6BB474-Yageo-datasheet-166511530.pdf?src-supplier=Future+Electronics, ComponentLink3URL=https://datasheet.octopart.com/CC0402KRX7R6BB474-Yageo-datasheet-166511530.pdf?src-supplier=Future+Electronics, Description 1="Multilayer Ceramic Capacitor, 0.47 uF, 50 V, ± 2%, C0G (NP0), 0402 [1005 Metric]", Halogen Free="Halogen Free", Lead Free="Lead Free", Length=0.039inch, Mounting Technology="Surface Mount", Packaging="Tape and Reel", Pricing 1="1=0.238, 10=0.142 (USD)", RoHS 1=Yes, RoHS Compliant=Yes, Series=CC, Stock 1=9400, Supplier 1=Newark, Thickness=0.022inch, Voltage Rating (DC)=10V, Width=0.02inch
C4A C4B C8 C9 C11 C14 C21: library part "CAP CER 10uF 25V X5R 0805", "Cap Ceramic 10uF 25V X5R 10% SMD 0805 85°C Embossed T/R", Case Code (Imperial)=0805, Case Code (Metric)=2012, Dielectric=X5R, Manufacturer=Samsung, Manufacturer Part Number=CL21A106KAYNNNE, Max Operating Temperature=85°C, Min Operating Temperature=-55°C, Package Quantity=1, Supplier Part Number 1=1276-2891-2-ND, Tolerance=10%, Voltage Rating=25V, Capacitance=10uF, Case/Package=0805, Category="Ceramic Capacitors", ComponentLink1Description=https://datasheet.ciiva.com/25796/cl21a106kaynnne-25796720.pdf?src-supplier=Digi-Key, ComponentLink1URL=https://datasheet.ciiva.com/25796/cl21a106kaynnne-25796720.pdf?src-supplier=Digi-Key, ComponentLink2Description=https://datasheet.ciiva.com/26838/getdatasheetpartid-357558-26838583.pdf?src-supplier=Verical, ComponentLink2URL=https://datasheet.ciiva.com/26838/getdatasheetpartid-357558-26838583.pdf?src-supplier=Verical, Construction=Flat, Depth=1.25mm, Height=1.25mm, Length=2mm, Mount="Surface Mount", Packaging="Tape and Reel", Pricing 1="2000=0.03549, 4000=0.03247 (USD)", Radiation Hardening=No, RoHS=Yes, RoHS Compliant=Yes, Series=CL, Stock 1=2266338, Supplier 1=Digi-Key, Thickness=0.057inch, Width=0.049inch
C6A C6B: library part "CAP CER 100pF 50V C0G 0402", "0402 100 pF 50 V ±5% Tolerance NP0/C0G Multilayer Ceramic Chip Capacitor", Case Code (Imperial)=0402, Case Code (Metric)=1005, Dielectric=C0G, Manufacturer=Yageo, Manufacturer Part Number=CC0402JPNPO9BN101, Max Operating Temperature=125°C, Min Operating Temperature=-55°C, Resistor Type=Ceramic, Supplier Part Number 1=13-CC0402JPNPO9BN101CT-ND, Tolerance=5%, Voltage Rating (DC)=50V, Capacitance=100pF, Case/Package=0402, Category="Ceramic Capacitors", ComponentLink1Description=http://www.mouser.com/ds/2/447/Yageo_UPY-GP_NP0_16V-to-50V_9-358835.pdf?src-supplier=Mouser, ComponentLink1URL=http://www.mouser.com/ds/2/447/Yageo_UPY-GP_NP0_16V-to-50V_9-358835.pdf?src-supplier=Mouser, ComponentLink2Description=http://components.arrow.com/part/dataview/0323_04038301?src-supplier=Arrow+Europe, ComponentLink2URL=http://components.arrow.com/part/dataview/0323_04038301?src-supplier=Arrow+Europe, Depth=0.5mm, Length=1mm, Packaging="Tape and Reel", Pricing 1="1=0.10000, 10=0.01900, 50=0.01040, 100=0.00850, 500=0.00604, 1000=0.00475, 2500=0.00432, 5000=0.00397 (USD)", RoHS=Yes, RoHS Compliant=Yes, Stock 1=83787, Supplier 1=Digi-Key, Termination=SMD/SMT, Weight=2.3E-05oz, Width=0.5mm
C7: library part "CAP CER 4.7uF 10V X5R 0402", "0402 10 V 4.7 uF ±20% Tolerance X5R Multilayer Ceramic Chip Capacitor", Case Code (Imperial)=0402, Case Code (Metric)=1005, Manufacturer=Murata, Manufacturer Part Number=GRM155R61A475MEAAD, Max Operating Temperature=85°C, Min Operating Temperature=-55°C, Supplier Part Number 1=92AH5018, Tolerance=20%, Voltage Rating=10V, Capacitance=4.7uF, Case/Package=0402, Category="Ceramic Capacitors", ComponentLink1Description=http://www.farnell.com/datasheets/2189109.pdf?src-supplier=Farnell, ComponentLink1URL=http://www.farnell.com/datasheets/2189109.pdf?src-supplier=Farnell, ComponentLink2Description=http://www.farnell.com/datasheets/2189109.pdf?src-supplier=Newark, ComponentLink2URL=http://www.farnell.com/datasheets/2189109.pdf?src-supplier=Newark, ComponentLink3Description=http://www.farnell.com/datasheets/2189109.pdf?src-supplier=Element14, ComponentLink3URL=http://www.farnell.com/datasheets/2189109.pdf?src-supplier=Element14, ComponentLink4Description=https://search.murata.co.jp/Ceramy/image/img/A01X/G101/ENG/GRM155R61A475MEAA-01.pdf?src-supplier=Digi-Key, ComponentLink4URL=https://search.murata.co.jp/Ceramy/image/img/A01X/G101/ENG/GRM155R61A475MEAA-01.pdf?src-supplier=Digi-Key, Mount="Surface Mount", Packaging="Tape and Reel", Pricing 1="1=0.02400, 10000=0.02400, 20000=0.02300, 40000=0.02100, 60000=0.02000 (USD)", RoHS=Yes, RoHS Compliant=Yes, Stock 1=280000, Supplier 1=Newark
C12 C27: library part "CAP CER 1uF 50V X5R 0603", "Multilayer Ceramic Capacitors (High dielectric type), 50V, 1 uF, ± 10 %, 0603, X5R, RoHS", Case Code (Imperial)=0603, Case Code (Metric)=1608, Dielectric=X5R, Manufacturer="Taiyo Yuden", Manufacturer Part Number=UMK107BJ105KA-T, Max Operating Temperature=85°C, Min Operating Temperature=-55°C, Package Quantity=1, Supplier Part Number 1=587-2400-1-ND, Tolerance=10%, Voltage Rating=50V, Capacitance=1uF, Case/Package=0603, Category="Ceramic Capacitors", ComponentLink1Description=https://datasheet.ciiva.com/134/umk107bj105ka-t-ss-134740.pdf?src-supplier=Digi-Key, ComponentLink1URL=https://datasheet.ciiva.com/134/umk107bj105ka-t-ss-134740.pdf?src-supplier=Digi-Key, ComponentLink2Description=https://datasheet.ciiva.com/11601/umk107bj105ka-t-ss-11601811.pdf?src-supplier=Avnet, ComponentLink2URL=https://datasheet.ciiva.com/11601/umk107bj105ka-t-ss-11601811.pdf?src-supplier=Avnet, ComponentLink3Description=https://datasheet.ciiva.com/5744/1697715-5744913.pdf?src-supplier=Farnell, ComponentLink3URL=https://datasheet.ciiva.com/5744/1697715-5744913.pdf?src-supplier=Farnell, ComponentLink4Description=https://datasheet.ciiva.com/30199/43umk107bj105ka-t-30199791.pdf?src-supplier=Onlinecomponents.com, ComponentLink4URL=https://datasheet.ciiva.com/30199/43umk107bj105ka-t-30199791.pdf?src-supplier=Onlinecomponents.com, ComponentLink5Description=https://datasheet.ciiva.com/15922/336umk107bj105ka-t-15922611.pdf?src-supplier=Onlinecomponents.com, ComponentLink5URL=https://datasheet.ciiva.com/15922/336umk107bj105ka-t-15922611.pdf?src-supplier=Onlinecomponents.com, ComponentLink6Description=https://datasheet.ciiva.com/5427/mlcc-all-e-541559-5427036.pdf?src-supplier=Mouser, ComponentLink6URL=https://datasheet.ciiva.com/5427/mlcc-all-e-541559-5427036.pdf?src-supplier=Mouser, ComponentLink7Description=https://datasheet.ciiva.com/7975/mlcc-all-e-7975898.pdf?src-supplier=Element14, ComponentLink7URL=https://datasheet.ciiva.com/7975/mlcc-all-e-7975898.pdf?src-supplier=Element14, ComponentLink8Description=https://datasheet.ciiva.com/7975/1697715-7975608.pdf?src-supplier=Element14, ComponentLink8URL=https://datasheet.ciiva.com/7975/1697715-7975608.pdf?src-supplier=Element14, ComponentLink9Description=https://datasheet.ciiva.com/22694/1697715-22694278.pdf?src-supplier=Element14, ComponentLink9URL=https://datasheet.ciiva.com/22694/1697715-22694278.pdf?src-supplier=Element14, Construction=Flat, Contact Plating=Nickel, Depth=0.8mm, Halogen Free="Halogen Free", Height=0.8mm, Length=1.6mm, Mount="Surface Mount", Number of Pins=2, Packaging="Tape and Reel", Pricing 1="1=0.19000, 10=0.12900, 50=0.07760, 100=0.06560, 500=0.04484, 1000=0.03968 (USD)", Radiation Hardening=No, REACH SVHC=Unknown, RoHS=Yes, RoHS Compliant=Yes, Series=M, Stock 1=955108, Supplier 1=Digi-Key, Termination=SMD/SMT, Thickness=0.035inch, Voltage Rating (DC)=50V, Width=0.031inch
FB1A FB1B FB2A FB2B FB3 FB4 FB5 FB6: library part "FB 68R 400mA 310mR 0402", "Ferrite Beads Multi-Layer 68Ohm 25% 100MHz 400mA 310mOhm DCR 0402 T/R", Case Code (Imperial)=0402, Case Code (Metric)=1005, DC Resistance (DCR)=310mR, Frequency=100MHz, Manufacturer="Taiyo Yuden", Manufacturer Part Number=BK1005LL680-T, Max Current Rating=400mA, Max Operating Temperature=125°C, Min Operating Temperature=-55°C, Package Quantity=1, Supplier Part Number 1=587-1860-1-ND, Tolerance=25%, Case/Package=0402, Category="Ferrite Beads and Chips", ComponentLink1Description=https://datasheet.ciiva.com/1013/bk1005ll680-t-ss-1013936.pdf?src-supplier=Digi-Key, ComponentLink1URL=https://datasheet.ciiva.com/1013/bk1005ll680-t-ss-1013936.pdf?src-supplier=Digi-Key, ComponentLink2Description=https://datasheet.ciiva.com/1013/mlci07-e-1013935.pdf?src-supplier=Digi-Key, ComponentLink2URL=https://datasheet.ciiva.com/1013/mlci07-e-1013935.pdf?src-supplier=Digi-Key, ComponentLink3Description=https://datasheet.ciiva.com/1013/mlci07-e-1013937.pdf?src-supplier=Digi-Key, ComponentLink3URL=https://datasheet.ciiva.com/1013/mlci07-e-1013937.pdf?src-supplier=Digi-Key, Core Material=Ferrite, Depth=0.55mm, Halogen Free="Halogen Free", Height=0.022inch, Impedance=68R, Lead Free="Lead Free", Length=0.039inch, Max DC Current=400mA, Mount="Surface Mount", Number of Lines=1, Number of Pins=2, Packaging="Tape and Reel", Pricing 1="1=0.10000, 10=0.04100, 25=0.03640, 50=0.03300, 100=0.02970, 250=0.02176, 500=0.01584, 1000=0.01551, 5000=0.01056 (USD)", REACH SVHC=Unknown, RoHS=Yes, Series=BK, Shielding=Unshielded, Stock 1=9707, Supplier 1=Digi-Key, Termination=SMD/SMT, Test Frequency=100MHz, Width=0.02inch
J1 J2 J6 J7 J13: library part "CON SMA BORE TH HJ-SMA058"
J5 J10: library part "CONN HDR 08 MALE RA 2 ROW", "SMT Angled Pin Header WR-PHD, Pitch 2.54 mm, Dual Row, 8 pins", Color=Black, Current Rating=3A, Flammability Rating="UL94 V-0", Manufacturer="Wurth Electronics", Supplier Part Number 1=72Y1215, Voltage Rating=250V, Category=Connectors, ComponentLink1Description=http://www.farnell.com/cad/1889791.pdf?src-supplier=Element14, ComponentLink1URL=http://www.farnell.com/cad/1889791.pdf?src-supplier=Element14, ComponentLink2Description=https://katalog.we-online.de/em/datasheet/6101xx249121.pdf?src-supplier=Digi-Key, ComponentLink2URL=https://katalog.we-online.de/em/datasheet/6101xx249121.pdf?src-supplier=Digi-Key, ComponentLink3Description=https://www.distrelec.bizhttp://katalog.we-online.de/em/datasheet/6101xx249121.pdf?mime=application%2Fpdf&src-supplier=Distrelec, ComponentLink3URL=https://www.distrelec.bizhttp://katalog.we-online.de/em/datasheet/6101xx249121.pdf?mime=application%2Fpdf&src-supplier=Distrelec, Connector Type=Header, Contact Finish - Mating=GOLD, Contact Material="Copper Alloy", Contact Mating Length=0.236inch, Contact Plating=Gold, Contact Shape=Square, Contact Type="Male Pin", Fastening Type=Pull, Gender=Male, Insulation Color=Black, Insulation Material=Nylon, Manufacturer Part Number=610108249121, Mount="Surface Mount", Number of Contacts=8, Number of Pins=8, Number of Positions=8, Number of Rows=2, Packaging="Cut Tape", Pitch=0.1inch, Pricing 1="1=1.53000, 10=1.52000, 25=1.49000, 50=1.46000, 100=1.36000 (USD)", RoHS=Yes, RoHS Compliant=Yes, Row Spacing=0.1inch, Series=WR-PHD, Stock 1=350, Supplier 1=Newark, Termination=Solder
J9 J11: library part "CONN HDR 08 FEMALE RA 2 ROW", "Conn Socket Strip RCP 8 POS 2mm Solder RA SMD T/R", Current Rating=2A, Flammability Rating="UL94 V-0", Insulation Color=Black, Manufacturer=Harwin, Max Operating Temperature=105°C, Min Operating Temperature=-40°C, Supplier Part Number 1=45AJ6425, Category=Connectors, ComponentLink1Description=https://cdn.harwin.com/pdfs/M22-655R.pdf?src-supplier=Digi-Key, ComponentLink1URL=https://cdn.harwin.com/pdfs/M22-655R.pdf?src-supplier=Digi-Key, Connector Type=Receptacle,Forked, Contact Material=Bronze, Contact Plating=Gold, Contact Shape=Square, Fastening Type=Push,Pull, Insulation Material=Polymer, Manufacturer Part Number=M22-6550442R, Mount="Surface Mount", Number of Positions=8, Number of Rows=2, Packaging="Cut Tape", Pricing 1="1=1.17000, 100=0.91900, 250=0.84000, 500=0.76600, 1000=0.71200 (USD)", RoHS=Yes, RoHS Compliant=Yes, Stock 1=750, Supplier 1=Newark, Termination=Solder
M1 M2 M3 M4: library part "MECH M2.0 UNPLATED"
R1A R1B R2A R2B: library part "RES 100R 63mW 1% 0402", "Res General Purpose Thick Film 0402 100 Ohm 1% 1/16W ±100ppm/°C Molded SMD Paper T/R", Case Code (Imperial)=0402, Case Code (Metric)=1005, Manufacturer=Yageo, Manufacturer Part Number=RC0402FR-07100RL, Max Operating Temperature=155°C, Max Power Dissipation=63mW, Min Operating Temperature=-55°C, Power Rating=62.5mW, Resistance Tolerance=1%, Resistor Type="Thick Film", Supplier Part Number 1=45Y6897, Temperature Coefficient=100ppm/°C, Voltage Rating=50V, Case/Package=0402, Category="Chip SMD Resistors", ComponentLink1Description=https://datasheet.ciiva.com/11808/0900766b80c66297-11808765.pdf?src-supplier=RSComponents, ComponentLink1URL=https://datasheet.ciiva.com/11808/0900766b80c66297-11808765.pdf?src-supplier=RSComponents, ComponentLink2Description=https://datasheet.ciiva.com/7849/1784430-7849810.pdf?src-supplier=Element14, ComponentLink2URL=https://datasheet.ciiva.com/7849/1784430-7849810.pdf?src-supplier=Element14, ComponentLink3Description=https://datasheet.ciiva.com/28367/1018594-28367226.pdf?src-supplier=Element14, ComponentLink3URL=https://datasheet.ciiva.com/28367/1018594-28367226.pdf?src-supplier=Element14, ComponentLink4Description=https://datasheet.ciiva.com/22747/1018594-22747511.pdf?src-supplier=Element14, ComponentLink4URL=https://datasheet.ciiva.com/22747/1018594-22747511.pdf?src-supplier=Element14, ComponentLink5Description=https://datasheet.ciiva.com/12667/pyu-rc0402-51-rohs-l-6-r-12667957.pdf?src-supplier=Mouser, ComponentLink5URL=https://datasheet.ciiva.com/12667/pyu-rc0402-51-rohs-l-6-r-12667957.pdf?src-supplier=Mouser, ComponentLink6Description=https://datasheet.ciiva.com/15189/getdatasheetpartid-329466-15189335.pdf?src-supplier=Verical, ComponentLink6URL=https://datasheet.ciiva.com/15189/getdatasheetpartid-329466-15189335.pdf?src-supplier=Verical, ComponentLink7Description=https://datasheet.ciiva.com/16740/pyu-rc0402-51-rohs-l-6-r-16740566.pdf?src-supplier=Future+Electronics, ComponentLink7URL=https://datasheet.ciiva.com/16740/pyu-rc0402-51-rohs-l-6-r-16740566.pdf?src-supplier=Future+Electronics, Construction=Rectangular, Depth=0.5mm, Features="Moisture Resistant", Height=0.32mm, Lead Free="Lead Free", Length=1mm, Military Standard=Not, Number of Pins=2, Number of Terminations=2, Packaging="Tape and Reel", Pricing 1="1=0.00100, 10000=0.00100 (USD)", Reach SVHC Compliant=Yes, Resistance=100R, RoHS=Yes, RoHS Compliant=Yes, Series=RC, Size Code=0402, Stock 1=4390000, Supplier 1=Newark, Technology="THICK FILM", Termination=SMD/SMT, Tolerance=1%, Voltage Rating (DC)=50V, Width=0.5mm
R3A R3B: library part "RES 200R 1% 63mW 0402", "SMD Chip Resistor, 200 Ohm, ± 1%, 63 mW, 0402 [1005 Metric], Thick Film, General Purpose", Case Code (Imperial)=0402, Case Code (Metric)=1005, Manufacturer 1=Yageo, Manufacturer Part Number 1=RC0402FR-07200RL, Max Operating Temperature=155°C, Max Power Dissipation=63mW, Min Operating Temperature=-55°C, Package Quantity=1, Resistance Tolerance=1%, Resistor Type="Thick Film", Supplier Part Number 1=5740899, Temperature Coefficient=100ppm/°C, Voltage Rating=50V, Case/Package=0402, Category 1="Chip SMD Resistors", ComponentLink1Description=https://datasheet.ciiva.com/7849/1018594-7849899.pdf?src-supplier=Element14, ComponentLink1URL=https://datasheet.ciiva.com/7849/1018594-7849899.pdf?src-supplier=Element14, ComponentLink2Description=https://datasheet.ciiva.com/7849/1018594-7849898.pdf?src-supplier=Element14, ComponentLink2URL=https://datasheet.ciiva.com/7849/1018594-7849898.pdf?src-supplier=Element14, ComponentLink3Description=https://datasheet.ciiva.com/7983/1018594-7983509.pdf?src-supplier=Element14, ComponentLink3URL=https://datasheet.ciiva.com/7983/1018594-7983509.pdf?src-supplier=Element14, ComponentLink4Description=https://datasheet.ciiva.com/2553/pyu-r-int-thick-7-2553231.pdf?src-supplier=Digi-Key, ComponentLink4URL=https://datasheet.ciiva.com/2553/pyu-r-int-thick-7-2553231.pdf?src-supplier=Digi-Key, ComponentLink5Description=https://datasheet.ciiva.com/2553/pyu-r-int-thick-7-2553232.pdf?src-supplier=Digi-Key, ComponentLink5URL=https://datasheet.ciiva.com/2553/pyu-r-int-thick-7-2553232.pdf?src-supplier=Digi-Key, ComponentLink6Description=https://datasheet.ciiva.com/2553/pyu-r-int-thick-7-2553230.pdf?src-supplier=Digi-Key, ComponentLink6URL=https://datasheet.ciiva.com/2553/pyu-r-int-thick-7-2553230.pdf?src-supplier=Digi-Key, ComponentLink7Description=https://datasheet.ciiva.com/5562/pyu-rc0402-51-rohs-l-6-r-8721-5562539.pdf?src-supplier=Mouser, ComponentLink7URL=https://datasheet.ciiva.com/5562/pyu-rc0402-51-rohs-l-6-r-8721-5562539.pdf?src-supplier=Mouser, ComponentLink8Description=https://datasheet.ciiva.com/16804/pyu-rc0402-51-rohs-l-6-r-16804406.pdf?src-supplier=Future+Electronics, ComponentLink8URL=https://datasheet.ciiva.com/16804/pyu-rc0402-51-rohs-l-6-r-16804406.pdf?src-supplier=Future+Electronics, ComponentLink9Description=https://datasheet.ciiva.com/15189/getdatasheetpartid-331152-15189383.pdf?src-supplier=Verical, ComponentLink9URL=https://datasheet.ciiva.com/15189/getdatasheetpartid-331152-15189383.pdf?src-supplier=Verical, Construction=Rectangular, Depth=0.5mm, Description 1="SMD Chip Resistor, 200 Ohm, ± 1%, 63 mW, 0402 [1005 Metric], Thick Film, General Purpose", Features="Moisture Resistant", Height=0.016inch, Lead Free="Lead Free", Length=1mm, Military Standard=Not, Number of Terminations=2, Packaging="Tape and Reel", Power Rating=63mW, Pricing 1="10000=0.0012, 50000=0.0011, 300000=0.0011, 1000000=0.001, 3000000=0.0009 (USD)", Reach SVHC Compliant=No, RoHS 1=Yes, RoHS Compliant=Yes, Series=RC, Stock 1=4960000, Supplier 1="Future Electronics", Termination=SMD/SMT, Tolerance=1%, Voltage Rating (DC)=50V, Width=0.02inch
R5 R6: library part "RES 1k00 63mW 0402", "1 kOhms ¡À1% 0.063W, 1/16W Chip Resistor 0402 (1005 Metric) Moisture Resistant Thick Film", Case Code (Imperial)=0402, Case Code (Metric)=1005, Manufacturer=Yageo, Manufacturer Part Number=RC0402FR-071KL, Max Operating Temperature=155°C, Max Power Dissipation=63mW, Min Operating Temperature=-55°C, Power Rating=62.5mW, Resistance=1kR, Resistance Tolerance=1%, Resistor Type="Thick Film", Supplier Part Number 1=48Y4534, Temperature Coefficient=100ppm/°C, Voltage Rating=50V, Case/Package=0402, Category="Chip SMD Resistors", ComponentLink1Description=https://datasheet.ciiva.com/11819/0900766b80c66297-11819477.pdf?src-supplier=RSComponents, ComponentLink1URL=https://datasheet.ciiva.com/11819/0900766b80c66297-11819477.pdf?src-supplier=RSComponents, ComponentLink2Description=https://datasheet.ciiva.com/7983/1018594-7983502.pdf?src-supplier=Element14, ComponentLink2URL=https://datasheet.ciiva.com/7983/1018594-7983502.pdf?src-supplier=Element14, ComponentLink3Description=https://datasheet.ciiva.com/22747/1018594-22747513.pdf?src-supplier=Element14, ComponentLink3URL=https://datasheet.ciiva.com/22747/1018594-22747513.pdf?src-supplier=Element14, ComponentLink4Description=https://datasheet.ciiva.com/12666/pyu-rc0402-51-rohs-l-6-r-12666741.pdf?src-supplier=Mouser, ComponentLink4URL=https://datasheet.ciiva.com/12666/pyu-rc0402-51-rohs-l-6-r-12666741.pdf?src-supplier=Mouser, ComponentLink5Description=https://datasheet.ciiva.com/7849/1018594-7849869.pdf?src-supplier=Element14, ComponentLink5URL=https://datasheet.ciiva.com/7849/1018594-7849869.pdf?src-supplier=Element14, ComponentLink6Description=https://datasheet.ciiva.com/7849/1018594-7849871.pdf?src-supplier=Element14, ComponentLink6URL=https://datasheet.ciiva.com/7849/1018594-7849871.pdf?src-supplier=Element14, ComponentLink7Description=https://datasheet.ciiva.com/17063/pyu-rc0402-51-rohs-l-6-r-17063193.pdf?src-supplier=Future+Electronics, ComponentLink7URL=https://datasheet.ciiva.com/17063/pyu-rc0402-51-rohs-l-6-r-17063193.pdf?src-supplier=Future+Electronics, Construction=Rectangular, Depth=0.5mm, Features="Moisture Resistant", Height=0.32mm, Lead Free="Lead Free", Length=1mm, Military Standard=Not, Number of Pins=2, Number of Terminations=2, Packaging="Tape and Reel", Pricing 1="1=0.00100, 10000=0.00100 (USD)", Reach SVHC Compliant=Yes, RoHS=Yes, RoHS Compliant=Yes, Series=RC, Size Code=0402, Stock 1=3520000, Supplier 1=Newark, Technology="THICK FILM", Termination=SMD/SMT, Tolerance=1%, Voltage Rating (DC)=50V, Width=0.5mm
TP1 TP8 TP12 TP13 TP14 TP16 TP17 TP19 TP20: library part "TP 1mm", "SMT testpoint"
TP2A TP2B TP3A TP3B TP4A TP4B TP5 TP6: library part "TP U.FL", "CONN U.FL RCPT STR 50 OHM SMD", Case/Package=SMD/SMT, Dielectric Material=Polymer, Housing Color=Beige, Manufacturer=Hirose, Manufacturer Part Number=U.FL-R-SMT-1(80), Max Frequency=6GHz, Max Operating Temperature=90°C, Min Operating Temperature=-40°C, Package Quantity=10000, Body Material=Bronze, Body Plating=Silver, Category="RF / Coaxial Connectors", Center Contact Plating=Gold, ComponentLink1Description=http://www.mouser.com/ds/2/185/U.FL_catalog-939761.pdf?src-supplier=Mouser, ComponentLink1URL=http://www.mouser.com/ds/2/185/U.FL_catalog-939761.pdf?src-supplier=Mouser, ComponentLink2Description=https://www.hirose.com/product/en/download_file/key_name/U.FL-R-SMT-1%2880%29/category/Specification%20Sheet/doc_file_id/37638/?file_category_id=9&item_id=03310472280&is_series=&src-supplier=Digi-Key, ComponentLink2URL=https://www.hirose.com/product/en/download_file/key_name/U.FL-R-SMT-1%2880%29/category/Specification%20Sheet/doc_file_id/37638/?file_category_id=9&item_id=03310472280&is_series=&src-supplier=Digi-Key, Connector Type="Receptacle,Male Pin", Contact Material=Brass, Fastening Type=SNAP-ON, Impedance=50R, Lead Free="Lead Free", Mating Cycles=30, Mount="Surface Mount", Number of Ports=1, Packaging="Tape and Reel", Pricing 1="10000=0.81500, 20000=0.80000, 30000=0.78500 (USD)", RoHS=Yes, RoHS Compliant=Yes, Series=U.FL, Stock 1=40000, Supplier 1="Future Electronics", Termination=Solder
TP18 TP21 TP24 TP25: library part "TP CLIP 1206 RCWCTE", "Current Sense Resistors - SMD CHIP CHECKER HT=2.0 1206", Case Code (Imperial)=1206, Case Code (Metric)=3216, Current Rating=2A, Manufacturer="KOA Speer", Manufacturer Part Number=RCWCTE, Max Operating Temperature=125°C, Min Operating Temperature=-55°C, Resistance=0R, Supplier Part Number 1=2019-RCWCTECT-ND, Case/Package=1206, Category="Chip SMD Resistors", ComponentLink1Description=https://datasheet.ciiva.com/34302/1876186-34302940.pdf?src-supplier=Jameco, ComponentLink1URL=https://datasheet.ciiva.com/34302/1876186-34302940.pdf?src-supplier=Jameco, ComponentLink2Description=https://datasheet.ciiva.com/5556/rc-5556236.pdf?src-supplier=Mouser, ComponentLink2URL=https://datasheet.ciiva.com/5556/rc-5556236.pdf?src-supplier=Mouser, ComponentLink3Description=https://datasheet.ciiva.com/26821/getdatasheetpartid-110197-26821157.pdf?src-supplier=Verical, ComponentLink3URL=https://datasheet.ciiva.com/26821/getdatasheetpartid-110197-26821157.pdf?src-supplier=Verical, Depth=1.6mm, Height=2mm, Length=3.2mm, Military Standard=Not, Mount="Surface Mount", Packaging="Tape and Reel", Pricing 1="1=0.16000, 10=0.13700, 25=0.12120, 50=0.11320, 100=0.10500, 250=0.09292, 500=0.08888, 1000=0.07272 (USD)", RoHS=Yes, RoHS Compliant=Yes, Series=RC, Stock 1=282207, Supplier 1=Digi-Key, Termination=SMD/SMT, Width=1.6mm
U1A U1B: library part "IC AN SWITCH SPDT 340MHz 15R SN74LVC1G3157DCKR", "5-V, 2: 1 (SPDT), 1-channel general-purpose analog switch 6-SC70 -40 to 125", Case/Package=SC, Manufacturer 1="Texas Instruments", Max Operating Temperature=125°C, Max Supply Current=10uA, Max Supply Voltage=5.5V, Min Operating Temperature=-40°C, Min Supply Voltage=1.65V, Supplier Part Number 1=595-SN74LVC1G3157DCK, -3db Bandwidth=340MHz, Bandwidth=300MHz, Category 1="Interface ICs", ComponentLink1Description=https://datasheet.ciiva.com/34301/756764-34301477.pdf?src-supplier=Jameco, ComponentLink1URL=https://datasheet.ciiva.com/34301/756764-34301477.pdf?src-supplier=Jameco, ComponentLink2Description=https://datasheet.ciiva.com/15127/getdatasheetpartid-187022-15127388.pdf?src-supplier=Verical, ComponentLink2URL=https://datasheet.ciiva.com/15127/getdatasheetpartid-187022-15127388.pdf?src-supplier=Verical, ComponentLink3Description=https://datasheet.ciiva.com/41461/001187224-da-01-en-ic-switch-sn74lvc1g3157dckr-sc-70-6-tid-41461882.pdf?src-supplier=Conrad, ComponentLink3URL=https://datasheet.ciiva.com/41461/001187224-da-01-en-ic-switch-sn74lvc1g3157dckr-sc-70-6-tid-41461882.pdf?src-supplier=Conrad, ComponentLink4Description=https://datasheet.ciiva.com/1514/1857156-1514550.pdf?src-supplier=Element14, ComponentLink4URL=https://datasheet.ciiva.com/1514/1857156-1514550.pdf?src-supplier=Element14, ComponentLink5Description=https://datasheet.ciiva.com/46411/1786793-46411528.pdf?src-supplier=Element14, ComponentLink5URL=https://datasheet.ciiva.com/46411/1786793-46411528.pdf?src-supplier=Element14, ComponentLink6Description=https://datasheet.ciiva.com/1669/sn74lvc1g3157-1669381.pdf?src-supplier=Digi-Key, ComponentLink6URL=https://datasheet.ciiva.com/1669/sn74lvc1g3157-1669381.pdf?src-supplier=Digi-Key, ComponentLink7Description=https://datasheet.ciiva.com/1669/sn74lvc1g3157-1669380.pdf?src-supplier=Digi-Key, ComponentLink7URL=https://datasheet.ciiva.com/1669/sn74lvc1g3157-1669380.pdf?src-supplier=Digi-Key, ComponentLink8Description=https://datasheet.ciiva.com/1669/sn74lvc1g3157-1669382.pdf?src-supplier=Digi-Key, ComponentLink8URL=https://datasheet.ciiva.com/1669/sn74lvc1g3157-1669382.pdf?src-supplier=Digi-Key, ComponentLink9Description=https://datasheet.ciiva.com/14435/sn74lvc1g3157-14435733.pdf?src-supplier=Avnet, ComponentLink9URL=https://datasheet.ciiva.com/14435/sn74lvc1g3157-14435733.pdf?src-supplier=Avnet, Description 1="5-V, 2: 1 (SPDT), 1-channel general-purpose analog switch 6-SC70 -40 to 125", Height=0.9mm, Lead Free="Lead Free", Length=2mm, Manufacturer Part Number 1=SN74LVC1G3157DCKR, Mounting Technology="Surface Mount", Number of Bits=1, Number of Channels=1, Number of Circuits=1, Number of Inputs=1, Number of Outputs=2, Packaging="Tape and Reel", Pins=6, Pricing 1="1=0.34, 10=0.22, 50=0.22, 100=0.118, 1000=0.086, 10000=0.051 (USD)", Propagation Delay=300ps, Radiation Hardening=No, Reach SVHC Compliant=No, RoHS 1=Yes, RoHS Compliant=Yes, Series=-, Stock 1=368361, Supplier 1=Mouser, Supply Current=10uA, Supply Type=Single, Termination=SMD/SMT, Turn-Off Delay Time=3.8ns, Turn-On Delay Time=5.7ns, Weight=8.8E-05oz, Width=1.25mm
U2A U2B: library part "IC LOGIC INVERTER 32mA", "74LVC Series 5.5 V Surface Mount Single Schmitt-Trigger Inverter - SOT-353", Case/Package=SOT-353, High Level Output Current=-32mA, Low Level Output Current=32mA, Manufacturer 1=Diodes, Max Operating Temperature=125°C, Max Supply Voltage=5.5V, Min Operating Temperature=-40°C, Min Supply Voltage=1.65V, Package Quantity=3000, Quiescent Current=200uA, Supplier Part Number 1=9038438, Category 1="Logic Gates", ComponentLink1Description=https://datasheet.ciiva.com/22694/1718765-22694659.pdf?src-supplier=Element14, ComponentLink1URL=https://datasheet.ciiva.com/22694/1718765-22694659.pdf?src-supplier=Element14, ComponentLink2Description=https://datasheet.ciiva.com/1507/1718765-1507989.pdf?src-supplier=Element14, ComponentLink2URL=https://datasheet.ciiva.com/1507/1718765-1507989.pdf?src-supplier=Element14, Description 1="74LVC Series 5.5 V Surface Mount Single Schmitt-Trigger Inverter - SOT-353", Height=1mm, Input Type="SCHMITT TRIGGER", Lead Free="Lead Free", Length=2.2mm, Logic Function="Inverter,Schmitt Trigger", Manufacturer Part Number 1=74LVC1G14SE-7, Mounting Technology="Surface Mount", Number of Circuits=1, Number of Elements=1, Number of Inputs=1, Output Current=32mA, Output Type=PUSH-PULL, Packaging="Tape and Reel", Pins=5, Pricing 1="3000=0.0324, 9000=0.0313, 30000=0.0301, 60000=0.0294, 120000=0.0282 (USD)", Propagation Delay=6.5ns, Radiation Hardening=No, Reach SVHC Compliant=No, RoHS 1=Yes, RoHS Compliant=Yes, Schmitt Trigger Input=Yes, Series=74LVC, Stock 1=741000, Supplier 1="Future Electronics", Technology=CMOS, Turn-On Delay Time=14ns, Width=1.35mm
U3A U3B U4: library part "IC OPAMP SOT5/6-23 GENERIC", Case/Package=SOT, Category="Amplifiers - Op Amps, Buffer, Instrumentation", Mount="Surface Mount", Number of Channels=1, Number of Circuits=1, Number of Pins=6, RoHS=Yes, RoHS Compliant=Yes

## Via types
v1: diameter 0.45, hole 0.3, Top Layer to Bottom Layer, tented both sides, 412 vias
v2: diameter 1/0.45 (per signal layer), hole 0.3, Top Layer to Bottom Layer, tented bottom, 1 vias

## Nets (pads, with @x,y where several pads share a name; then routed paths per layer and width w, separated by ;. In a path a pad name is that pad's centre, name@x,y a point inside that pad or via, vN(x,y) a via of type N, cw(c..) or ccw(c..) an arc to the next point about the centre after c; other vN are vias at no path point)
BIAS: FB5.2 U4.1 U4.4 | length 6.3
  Top Layer w0.345: FB5.2 U4.1 69.125,22.1 70.1,22.1 70.4,21.8 70.4,20.8 70.698,20.502 71.673,20.502 U4.4
BIAS_REF: C8.2 R5.1 R6.2 U4.3 | length 5.3
  Top Layer w0.345: R5.1 67.63,16.095 68.795,16.095 R6.2 C8.2 U4.3
CLK_I: J6.1 U2A.2 | length 5.5
  Top Layer w0.345: J6.1 U2A.2
CLK_Q: J7.1 U2B.2 | length 5.5
  Top Layer w0.345: J7.1 U2B.2
CLK_SCL: J5.1 J9.1 J10.1 J11.1 TP1.1 | length 178.4
  Top Layer w0.3: J11.1@34.651,33.81 v1(36.184,33.81) ; J9.1@34.651,73.81 v1(36.184,73.81) 36.184,74.709 38.3,76.825 109.272,76.825 v1(111.767,74.33) 113.1,74.33 J5.1 ; v1(63.781,72.775) v1(63.781,72.775) 63.782,75.334 v1(63.784,75.335) ; v1(111.767,33.81) 113.1,33.81 J10.1
  Bottom Layer w0.3: v1(36.184,33.81) 36.65,34.276 36.65,61.989 32.489,66.15 32.489,71.964 34.335,73.81 v1(36.184,73.81) ; v1(63.784,75.335) v1(63.784,76.825) ; v1(111.767,33.81) 111.767,61.517 116.25,66 116.25,71.725 113.645,74.33 v1(111.767,74.33)
CLK_SDA: J5.2 J9.2 J10.2 J11.2 TP14.1 | length 196.5